# EAGLE board stm32-stamp64 (EAGLE 5.12)
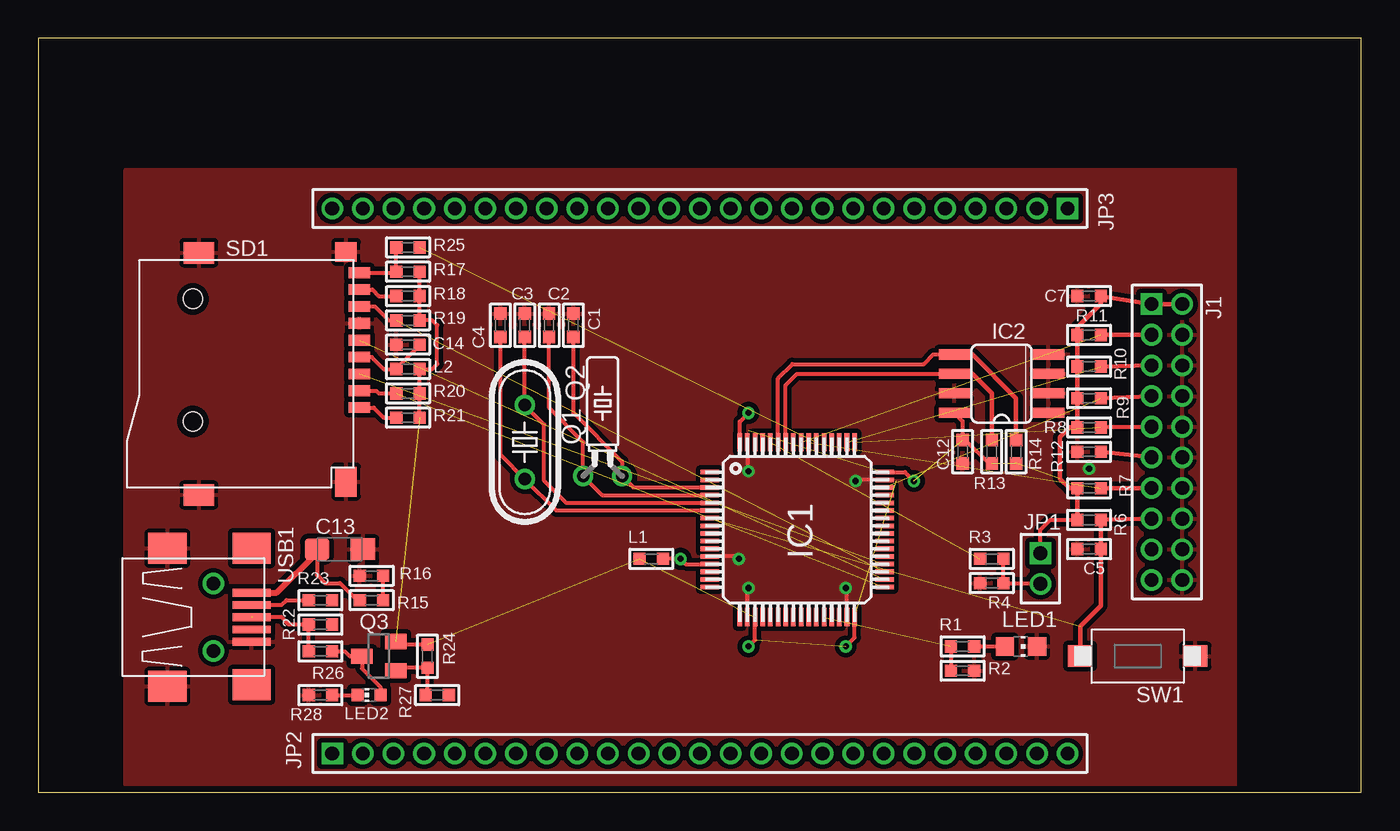
[diagram p0: board, top side]
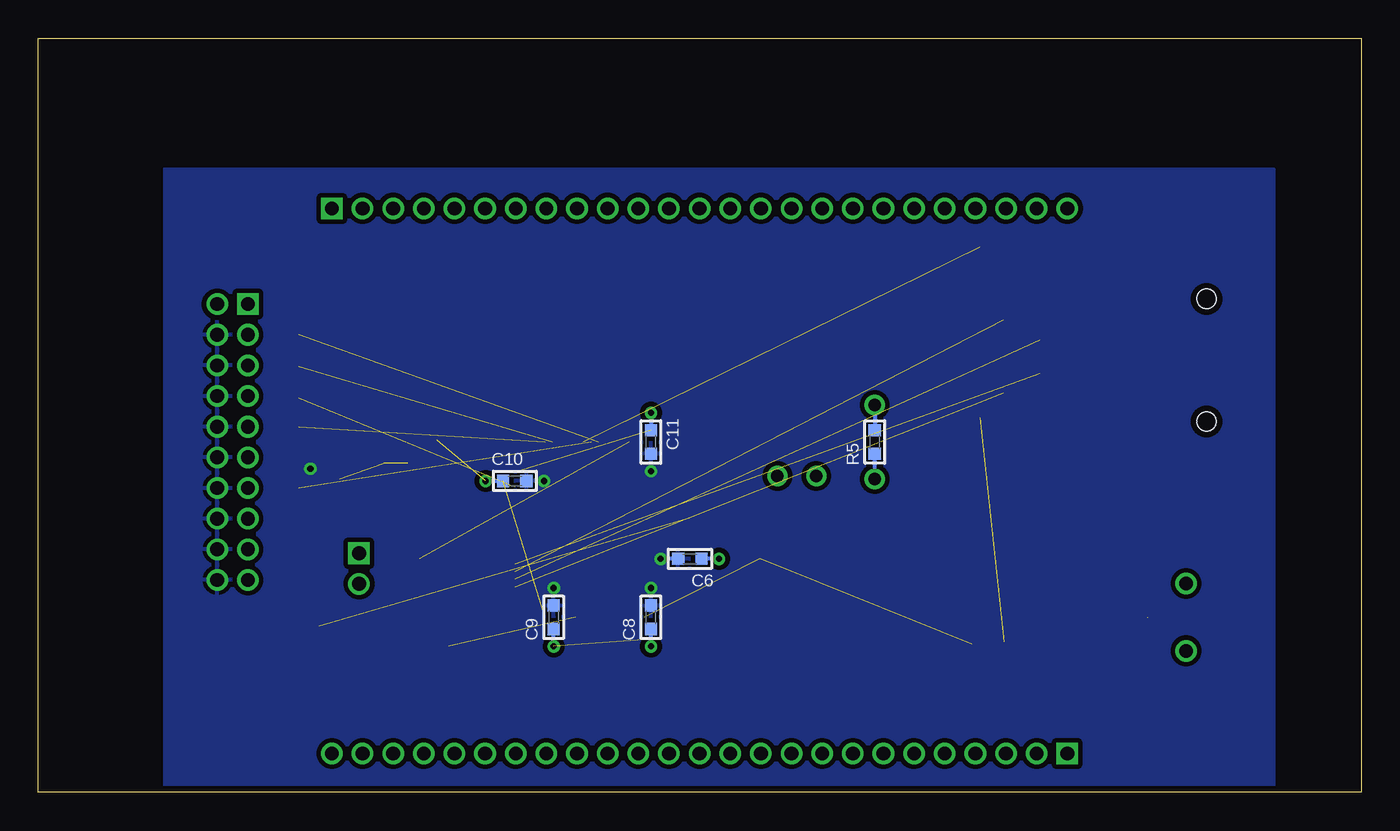
[diagram p1: board, bottom side, seen from below]

Size 86.34 x 49.2 mm. Coordinates in mm from the lower left corner, seen from the top.
Outline: 0,0 86.34,0 86.34,49.2 0,49.2 0,0
Copper layers (1*16): Top 0.035mm / dielectric 1.5mm / Bottom 0.035mm
Design rules "default *": minimum track width 0.16mm, minimum drill 0.4mm, track to track 0.16mm, track to pad 0.16mm, pad to pad 0.16mm, via to via 0.16mm, smd to smd 0.16mm, copper to edge 0.4mm, drill to drill 8mil, minimum pad ring 10mil, minimum via ring 8mil, stop-mask expansion 4mil, vias tented up to drill 0.6mm, thermal gap 10mil

## Footprints (pad centres in the part's own frame; a part is rotated, then mirrored left to right if it is on the bottom)
C0603 = smd 0.8 x 0.8: 1 -0.762,0; 2 0.762,0
SMC_A = smd 1.6 x 1.4: + -1.5,0; - 1.5,0
TQFP64 = smd 1.2 x 0.3: 1 -5.7,3.75; 2 -5.7,3.25; 3 -5.7,2.75; 4 -5.7,2.25; 5 -5.7,1.75; 6 -5.7,1.25; 7 -5.7,0.75; 8 -5.7,0.25; 9 -5.7,-0.25; 10 -5.7,-0.75; 11 -5.7,-1.25; 12 -5.7,-1.75; 13 -5.7,-2.25; 14 -5.7,-2.75; 15 -5.7,-3.25; 16 -5.7,-3.75; 33 5.7,-3.75; 34 5.7,-3.25; 35 5.7,-2.75; 36 5.7,-2.25; 37 5.7,-1.75; 38 5.7,-1.25; 39 5.7,-0.75; 40 5.7,-0.25; 41 5.7,0.25; 42 5.7,0.75; 43 5.7,1.25; 44 5.7,1.75; 45 5.7,2.25; 46 5.7,2.75; 47 5.7,3.25; 48 5.7,3.75 | smd 0.3 x 1.2: 17 -3.75,-5.7; 18 -3.25,-5.7; 19 -2.75,-5.7; 20 -2.25,-5.7; 21 -1.75,-5.7; 22 -1.25,-5.7; 23 -0.75,-5.7; 24 -0.25,-5.7; 25 0.25,-5.7; 26 0.75,-5.7; 27 1.25,-5.7; 28 1.75,-5.7; 29 2.25,-5.7; 30 2.75,-5.7; 31 3.25,-5.7; 32 3.75,-5.7; 49 3.75,5.7; 50 3.25,5.7; 51 2.75,5.7; 52 2.25,5.7; 53 1.75,5.7; 54 1.25,5.7; 55 0.75,5.7; 56 0.25,5.7; 57 -0.25,5.7; 58 -0.75,5.7; 59 -1.25,5.7; 60 -1.75,5.7; 61 -2.25,5.7; 62 -2.75,5.7; 63 -3.25,5.7; 64 -3.75,5.7
SO08 = smd 0.66 x 2.032: 1 -1.905,-3.073; 2 -0.635,-3.073; 3 0.635,-3.073; 4 1.905,-3.073; 5 1.905,3.073; 6 0.635,3.073; 7 -0.635,3.073; 8 -1.905,3.073
2X10M = drill 0.9 square: 1 -9,-1 | drill 0.9 round: 2 -9,1; 3 -7,-1; 4 -7,1; 5 -5,-1; 6 -5,1; 7 -3,-1; 8 -3,1; 9 -1,-1; 10 -1,1; 11 1,-1; 12 1,1; 13 3,-1; 14 3,1; 15 5,-1; 16 5,1; 17 7,-1; 18 7,1; 19 9,-1; 20 9,1
1X02M = drill 0.9 square: 1 -1,0 | drill 0.9 round: 2 1,0
1X25M = drill 0.9 square: 1 -24,0 | drill 0.9 round: 2 -22,0; 3 -20,0; 4 -18,0; 5 -16,0; 6 -14,0; 7 -12,0; 8 -10,0; 9 -8,0; 10 -6,0; 11 -4,0; 12 -2,0; 13 0,0; 14 2,0; 15 4,0; 16 6,0; 17 8,0; 18 10,0; 19 12,0; 20 14,0; 21 16,0; 22 18,0; 23 20,0; 24 22,0; 25 24,0
L0603 = smd 0.8 x 0.8: 1 -0.762,0; 2 0.762,0
CHIP-LED0805 = smd 1.2 x 1.2: A 0,-1.05; C 0,1.05
CHIP-LED0603 = smd 0.8 x 0.8: A 0,-0.75; C 0,0.75
TC26H = drill 0.813 round: 1 -1.27,0; 2 1.27,0
HC49/S = drill 0.813 round: 1 -2.413,0; 2 2.413,0
SOT23 = smd 1 x 1.4: 1 -0.95,-1.1; 2 0.95,-1.1; 3 0,1.1
R0603 = smd 0.8 x 0.8: 1 -0.762,0; 2 0.762,0
TF-PULL = smd 0.7 x 1.4: 1 -2.2,-7.62; 2 -1.1,-7.62; 3 0,-7.62; 4 1.1,-7.62; 5 2.2,-7.62; 6 3.3,-7.62; 7 4.4,-7.62; 8 5.5,-7.62; 9 6.6,-7.62 | smd 1.4 x 2: S1 -7.9,2.85; S2 7.9,2.85 | smd 1.28 x 1.4: S3 7.96,-6.75 | smd 1.95 x 1.4: S4 -7.025,-6.75 | hole 1.25: -3.1,3.25; 4.9,3.25
KSS-2EG4430 = smd 1.6 x 1.4: 1 -3.75,0; 2 3.75,0
USB-MB-S = smd 2.5 x 0.5: D+ 2.5,0; D- 2.5,0.8; GND 2.5,-1.6; ID 2.5,-0.8; VBUS 2.5,1.6 | smd 2.5 x 2: GND@1 -3,4.5; GND@2 2.5,4.5; GND@3 -3,-4.5; GND@4 2.5,-4.4 | drill 0.9 round: P$5 0,2.2; P$6 0,-2.2

## Placement (x,y rotation side)
C1  10pF  [C0603]  34.92,30.48 90 top
C2  10pF  [C0603]  33.34,30.48 90 top
C3  22pF  [C0603]  31.75,30.48 90 top
C4  22pF  [C0603]  30.16,30.48 90 top
C5  0.1  [C0603]  68.58,15.88 180 top
C6  0.1  [C0603]  43.81,15.24 180 bottom
C7  0.1  [C0603]  68.58,32.38 0 top
C8  0.1  [C0603]  46.35,11.43 90 bottom
C9  0.1  [C0603]  52.7,11.43 90 bottom
C10  0.1  [C0603]  55.24,20.32 0 bottom
C11  0.1  [C0603]  46.35,22.86 270 bottom
C12  0.1  [C0603]  60.33,22.23 270 top
C13  10uF  [SMC_A]  19.68,15.88 0 top
C14  0.1  [C0603]  24.13,29.21 180 top
IC1  STM32F103RBT6  [TQFP64]  49.53,17.14 0 top
IC2  CAT24M01WI-GT3  [SO08]  62.87,26.67 90 top
J1  JTAG-ARM-HDR2MM  [2X10M]  73.66,22.86 270 top
JP1  [1X02M]  65.41,14.61 270 top
JP2  [1X25M]  43.18,2.54 0 top
JP3  [1X25M]  43.18,38.1 180 top
L1  bead  [L0603]  40.01,15.24 0 top
L2  bead  [L0603]  24.13,27.62 180 top
LED1  [CHIP-LED0805]  64.14,9.53 270 top
LED2  [CHIP-LED0603]  21.59,6.35 90 top
Q1  32768Hz  [TC26H]  36.83,20.64 0 top
Q2  8MHz  [HC49/S]  31.75,22.86 270 top
Q3  MMBT2907A  [SOT23]  22.23,8.89 90 top
R1  220  [R0603]  60.33,9.53 0 top
R2  10K  [R0603]  60.33,7.94 0 top
R3  10K  [R0603]  62.23,15.24 0 top
R4  2.2K  [R0603]  62.23,13.65 0 top
R5  1M  [R0603]  31.75,22.86 90 bottom
R6  10K  [R0603]  68.58,17.78 180 top
R7  10K  [R0603]  68.58,19.84 180 top
R8  10K  [R0603]  68.58,23.81 180 top
R9  10K  [R0603]  68.58,25.72 180 top
R10  10K  [R0603]  68.58,27.78 180 top
R11  10K  [R0603]  68.58,29.84 180 top
R12  10K  [R0603]  68.58,22.23 0 top
R13  4.7K  [R0603]  62.23,22.23 270 top
R14  4.7K  [R0603]  63.82,22.23 270 top
R15  10K  [R0603]  21.75,12.54 0 top
R16  100K  [R0603]  21.75,14.13 180 top
R17  10K  [R0603]  24.13,33.97 0 top
R18  10K  [R0603]  24.13,32.38 0 top
R19  10K  [R0603]  24.13,30.8 0 top
R20  10K  [R0603]  24.13,26.04 0 top
R21  10K  [R0603]  24.13,24.45 0 top
R22  33  [R0603]  18.41,10.95 0 top
R23  33  [R0603]  18.41,12.54 0 top
R24  10K  [R0603]  25.4,8.89 270 top
R25  1K  [R0603]  24.13,35.56 180 top
R26  1.5K  [R0603]  18.41,9.21 180 top
R27  2K  [R0603]  26.04,6.35 0 top
R28  220  [R0603]  18.41,6.35 0 top
SD1  TF-HOLDER  [TF-PULL]  13.34,27.3 90 top
SW1  KSS-2EG4430  [KSS-2EG4430]  71.75,8.89 180 top
USB1  USB-MB-S  [USB-MB-S]  11.43,11.43 0 top

## Library data of the parts
C1-C14 L1 L2 R1-R28 = rc-master-smd
IC1 = stm32
IC2 = stm32-by-pb
J1 = atmel-arm
JP1-JP3 = pinhead-fixdrills
LED1 LED2 = led
Q1 Q2 = discrete
Q3 = semicon-smd-ipc
SD1 = sd-mmc
SW1 = buttons
USB1 = usb

## Nets
!CARD: IC1.54 R25.1
!CD: R17.1 R25.2 SD1.9
!JTRST: IC1.56 J1.3 R11.1
!RESET: C5.1 IC1.7 J1.15 R6.1 SW1.2
+3V3: C7.2 C8.1 C9.1 C10.1 C11.1 C12.1 IC1.19 IC1.32 IC1.48 IC1.64 IC2.8 J1.1 J1.2 JP1.1 L1.1 L2.1 Q3.2 R6.2 R7.2 R8.2 R9.2 R10.2 R11.2 R13.2 R14.2 R17.2 R18.2 R19.2 R20.2 R21.2 R24.1
+5V: C13.+ R15.1 USB1.VBUS
BOOT0: IC1.60 R3.1
BOOT1: IC1.28 R1.1 R2.1
GND: C1.2 C2.2 C3.2 C4.2 C5.2 C6.2 C7.1 C8.2 C9.2 C10.2 C11.2 C12.2 C13.- C14.2 IC1.12 IC1.18 IC1.31 IC1.47 IC1.63 IC2.1 IC2.2 IC2.3 IC2.4 IC2.7 J1.4 J1.6 J1.8 J1.10 J1.12 J1.14 J1.16 J1.18 J1.20 LED1.C R2.2 R4.1 R12.1 R16.2 R28.1 SD1.6 SD1.S1 SD1.S2 SD1.S3 SD1.S4 SW1.1 USB1.GND USB1.GND@1 USB1.GND@3
I2C1_SCL: IC1.58 IC2.6 R13.1
I2C1_SDA: IC1.59 IC2.5 R14.1
JTCK: IC1.49 J1.9 R8.1
JTDI: IC1.50 J1.5 R10.1
JTDO: IC1.55 J1.13 R7.1
JTMS: IC1.46 J1.7 R9.1
N$1: C14.1 L2.2 SD1.4
N$2: R21.1 SD1.1
N$3: JP1.2 R3.2 R4.2
N$4: R18.1 SD1.8
N$5: R23.1 USB1.D-
N$6: J1.11 R12.2
N$7: Q3.1 R24.2 R27.1
N$8: R22.1 R26.2 USB1.D+
N$9: LED2.C R28.2
N$10: LED2.A Q3.3 R26.1
N$11: IC1.14
N$12: IC1.15
N$13: IC1.16
N$14: IC1.17
N$15: IC1.20
N$16: IC1.21
N$17: IC1.22
N$18: IC1.23
N$19: IC1.41
N$20: IC1.42
N$21: IC1.43
N$22: IC1.44
N$23: IC1.45
N$24: IC1.26
N$25: IC1.27
N$26: IC1.57
N$27: IC1.61
N$28: IC1.62
N$29: IC1.29
N$30: LED1.A R1.2
N$31: IC1.30
N$33: IC1.53
N$34: IC1.52
N$35: IC1.51
N$36: IC1.40
N$37: IC1.39
N$38: IC1.38
N$39: IC1.37
N$40: IC1.25
N$41: IC1.24
N$42: IC1.11
N$43: IC1.10
N$44: IC1.9
N$45: IC1.8
OSC32_IN: C1.1 IC1.3 Q1.2
OSC32_OUT: C2.1 IC1.4 Q1.1
OSC_IN: C3.1 IC1.5 Q2.1 R5.2
OSC_OUT: C4.1 IC1.6 Q2.2 R5.1
PC13: IC1.2
SPI2_MISO: IC1.35 R19.1 SD1.7
SPI2_MOSI: IC1.36 SD1.3
SPI2_NSS: IC1.33 R20.1 SD1.2
SPI2_SCLK: IC1.34 SD1.5
USBCON: R27.2
USBD+: R22.2
USBD-: R23.2
USBVBUS: R15.2 R16.1
VBAT: IC1.1
VDDA: C6.1 IC1.13 L1.2

## Tracks (layer width: path | path; a pad name or v marks a point on that pad's centre or on a via)
!CARD  (1 unrouted)
!CD
  Top 0.254: R25.2 R17.1 23.3,33.91 SD1.9
!JTRST  (1 unrouted)
  Top 0.305: R11.1 J1.3
!RESET  (1 unrouted)
  Top 0.305: J1.15 R6.1 C5.1 69.34,12.19 68,10.86 SW1.2
+3V3  (via drill 0.4)  (9 unrouted)
  Top 0.254: IC1.64 45.78,24.19 v46.35,24.77 | IC1.19 46.78,9.95 v46.35,9.53 | IC1.32 53.28,10.1 v52.7,9.53 | IC1.48 56.58,20.89 v57.15,20.32 | R13.2 62.04,21.46 60.52,22.99 C12.1 60.33,24.23 IC2.8 | R24.1 23.51,9.65 Q3.2 | R17.2 R18.2 R19.2 25.72,30.8 26.04,30.48 26.04,27.94 25.72,27.62 L2.1 R20.2 R21.2 | JP1.1 65.41,17.14 66.04,17.78 R6.2
  Top 0.305: J1.2 J1.1 C7.2 69.34,31.88 67.82,30.35 R11.2 R10.2 R9.2 R8.2 67.31,23.81 66.67,23.18 66.67,20.48 67.31,19.84 R7.2 R6.2
  Bottom 0.254: v46.35,24.77 C11.1 | v46.35,9.53 C8.1 | v52.7,9.53 C9.1 | v57.15,20.32 C10.1
+5V
  Top 0.254: R15.1 20.8,12.54 19.68,13.65 18.73,13.65 18.18,14.2 18.18,15.64
  Top 0.406: USB1.VBUS 15.57,13.03 18.18,15.64 C13.+
BOOT0  (1 unrouted)
BOOT1  (1 unrouted)
  Top 0.254: R1.1 R2.1
GND  (via drill 0.4)
  Top 0.254: IC1.31 52.78,13.26 v52.7,13.34 | IC1.47 53.41,20.39 v53.34,20.32 | IC1.63 46.28,21.03 v46.35,20.95 | IC1.18 46.28,13.26 v46.35,13.34 | IC1.12 45.56,15.39 v45.72,15.24
  Bottom 0.254: C6.2 v45.72,15.24
  other vias: 68.58,21.11
  pour Top (isolate 0.305): 78.11,0 5.71,0 5.71,40.64 78.11,40.64
  pour Bottom (isolate 0.305): 78.11,0 5.71,0 5.71,40.64 78.11,40.64
I2C1_SCL
  Top 0.254: IC2.6 49.53,27.3 48.78,26.55 IC1.58
  Top 0.305: R13.1 62.23,26.04 60.96,27.3 IC2.6
I2C1_SDA
  Top 0.254: IC1.59 48.28,27.01 49.21,27.94 57.78,27.94 58.42,28.57 IC2.5
  Top 0.305: R14.1 63.82,25.72 60.96,28.57 IC2.5
JTCK  (1 unrouted)
  Top 0.305: R8.1 J1.9
JTDI  (1 unrouted)
  Top 0.305: R10.1 J1.5
JTDO  (1 unrouted)
  Top 0.305: R7.1 J1.13
JTMS  (1 unrouted)
  Top 0.305: R9.1 J1.7
N$1
  Top 0.254: SD1.4 21.76,28.41 22.54,27.62 L2.2 23.37,27.65 24.89,29.18 C14.1
N$2
  Top 0.254: R21.1 22.54,24.45 21.89,25.11 SD1.1
N$3
  Top 0.254: JP1.2 65.36,13.65 R4.2 R3.2
N$4
  Top 0.254: SD1.8 21.8,32.8 22.23,32.38 R18.1
N$5
  Top 0.254: R23.1 16.19,12.54 15.88,12.23 USB1.D-
N$6
  Top 0.305: R12.2 J1.11
N$7
  Top 0.254: Q3.1 23.51,8.13 R24.2 25.4,6.48 R27.1
N$8  (1 unrouted)
  Top 0.254: R26.2 R22.1 16.35,10.95 15.88,11.43 13.97,11.43
N$9
  Top 0.254: R28.2 LED2.C
N$10
  Top 0.254: LED2.A 22.34,6.87 21.12,8.09 Q3.3 20.32,8.89 20,9.21 R26.1
N$30
  Top 0.254: R1.2 LED1.A
OSC32_IN
  Top 0.254: IC1.3 38.84,19.89 Q1.2 38.1,21.59 34.92,24.77 C1.1
OSC32_OUT
  Top 0.254: IC1.4 36.8,19.39 Q1.1 35.56,22.86 33.34,25.08 C2.1
OSC_IN
  Top 0.254: IC1.5 34.45,18.89 33.02,20.32 33.02,24 Q2.1 C3.1
  Bottom 0.254: Q2.1 R5.2
OSC_OUT
  Top 0.254: IC1.6 33.8,18.39 Q2.2 30.16,22.04 C4.1
  Bottom 0.254: Q2.2 R5.1
SPI2_MISO  (1 unrouted)
  Top 0.254: SD1.7 21.95,31.7 22.86,30.8 R19.1
SPI2_MOSI  (1 unrouted)
SPI2_NSS  (1 unrouted)
  Top 0.254: SD1.2 22.05,26.2 22.23,26.04 R20.1
SPI2_SCLK  (1 unrouted)
USBVBUS
  Top 0.254: R15.2 R16.1 | R16.1
VDDA  (via drill 0.4)
  Top 0.254: IC1.13 42.26,14.89 v41.91,15.24 L1.2
  Bottom 0.254: v41.91,15.24 C6.1